# Altium PCB Medusa-AI-ESP.PcbDoc (part 1 of 2)
Units mil, origin at the board's own origin, x right, y up, seen from the top; angles counter-clockwise.
Board outline 7750 x 7750 mil, 4 copper layers (Top Layer, Layer 1, Layer 2, Bottom Layer), stack 23.756 mil thick; 124 components, 93 nets, 550 pads, 211 vias.
Unrouted connection lines stored in the file: 1.
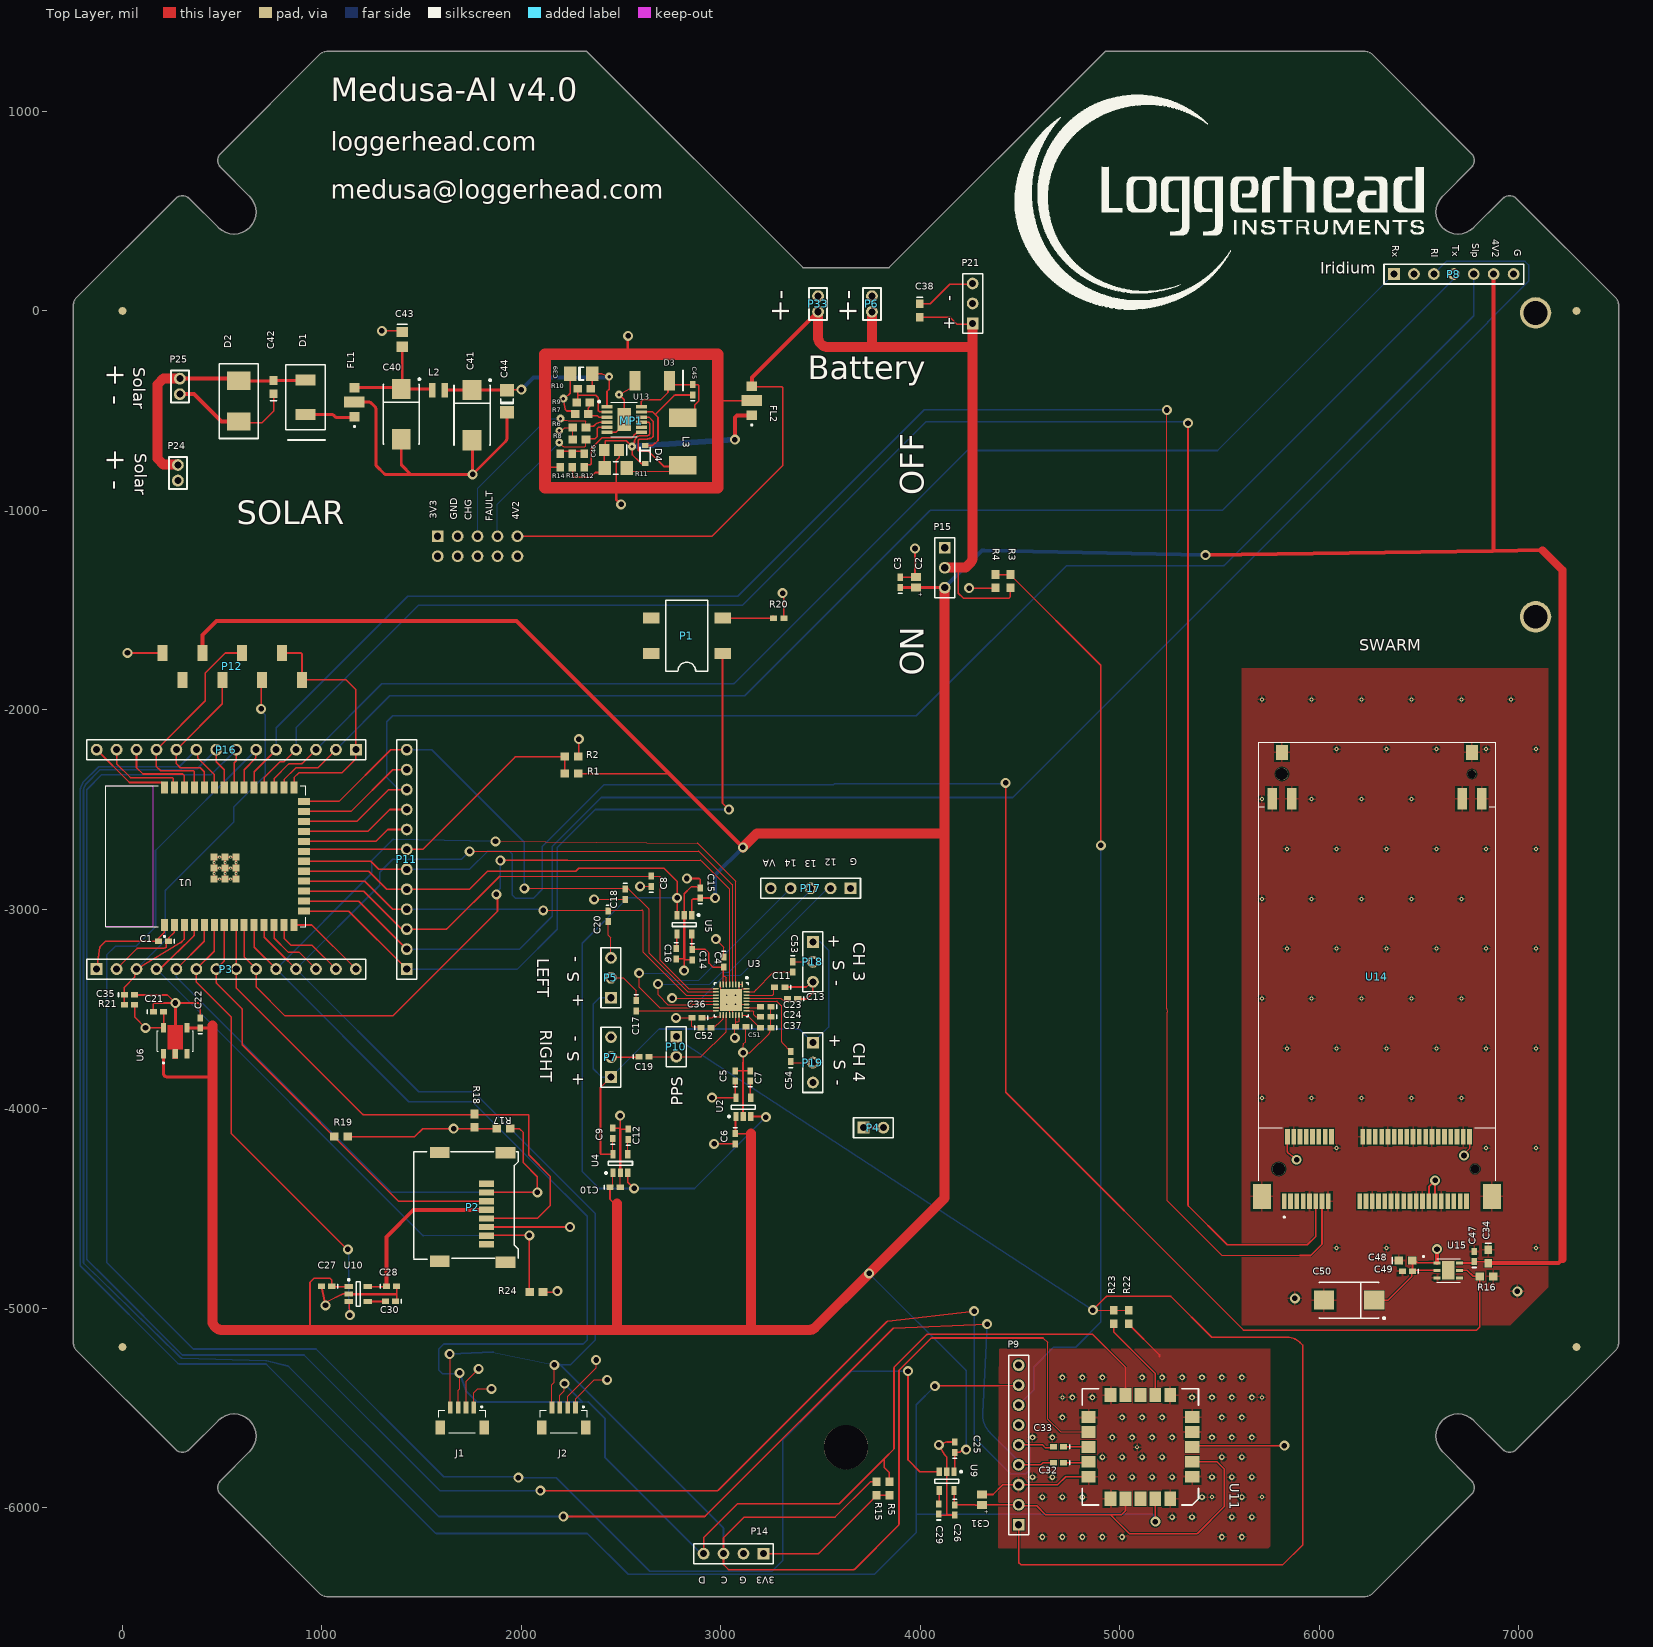
[diagram p0: Top Layer view]
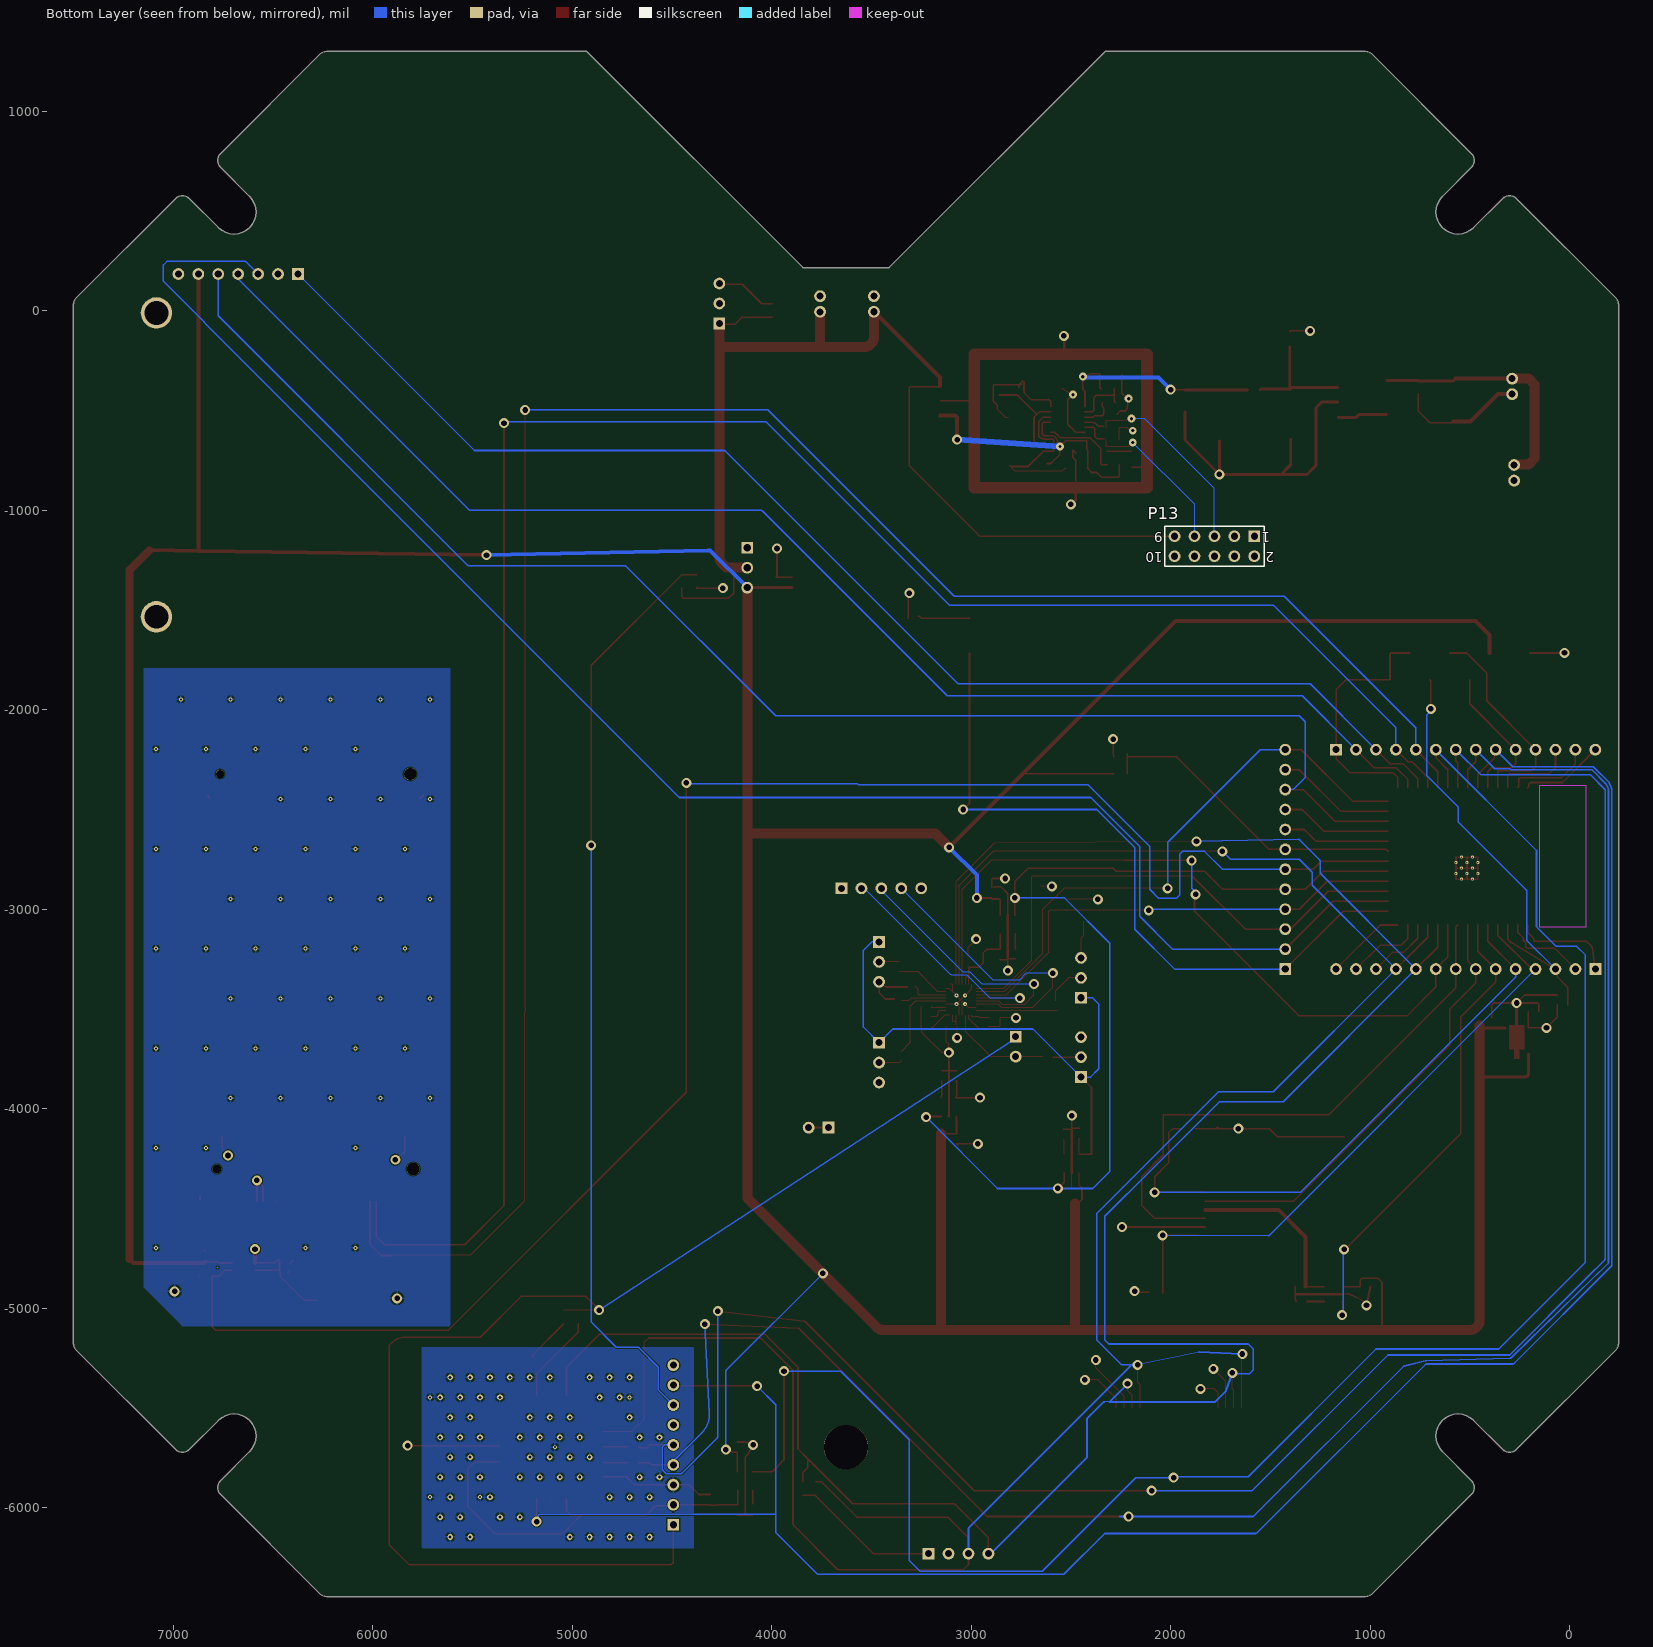
[diagram p1: Bottom Layer view, seen from below]
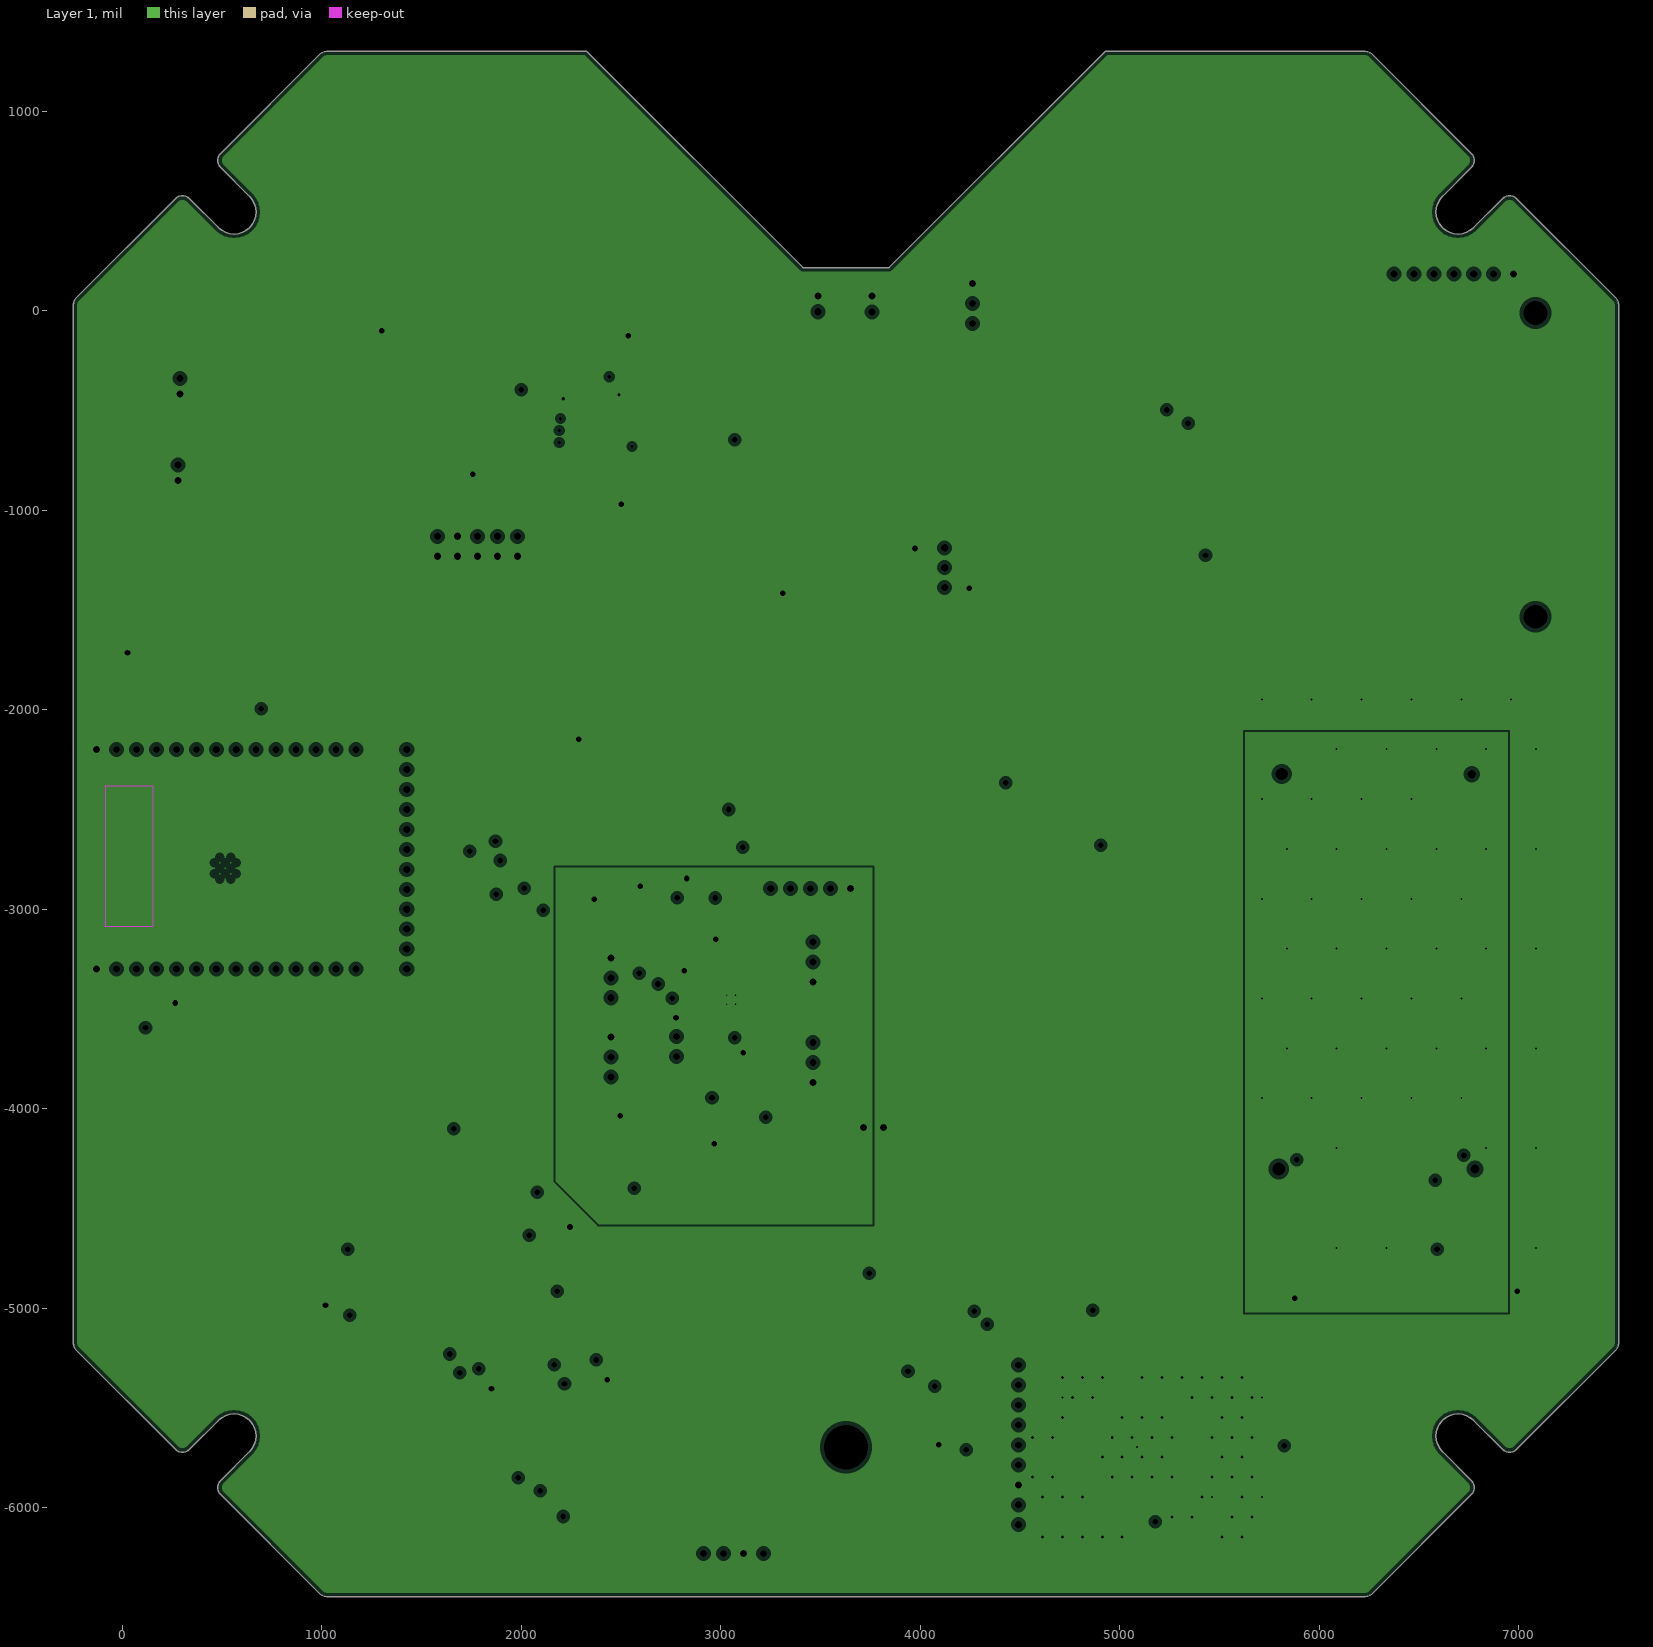
[diagram p2: Layer 1, clearances drawn from the general rule]
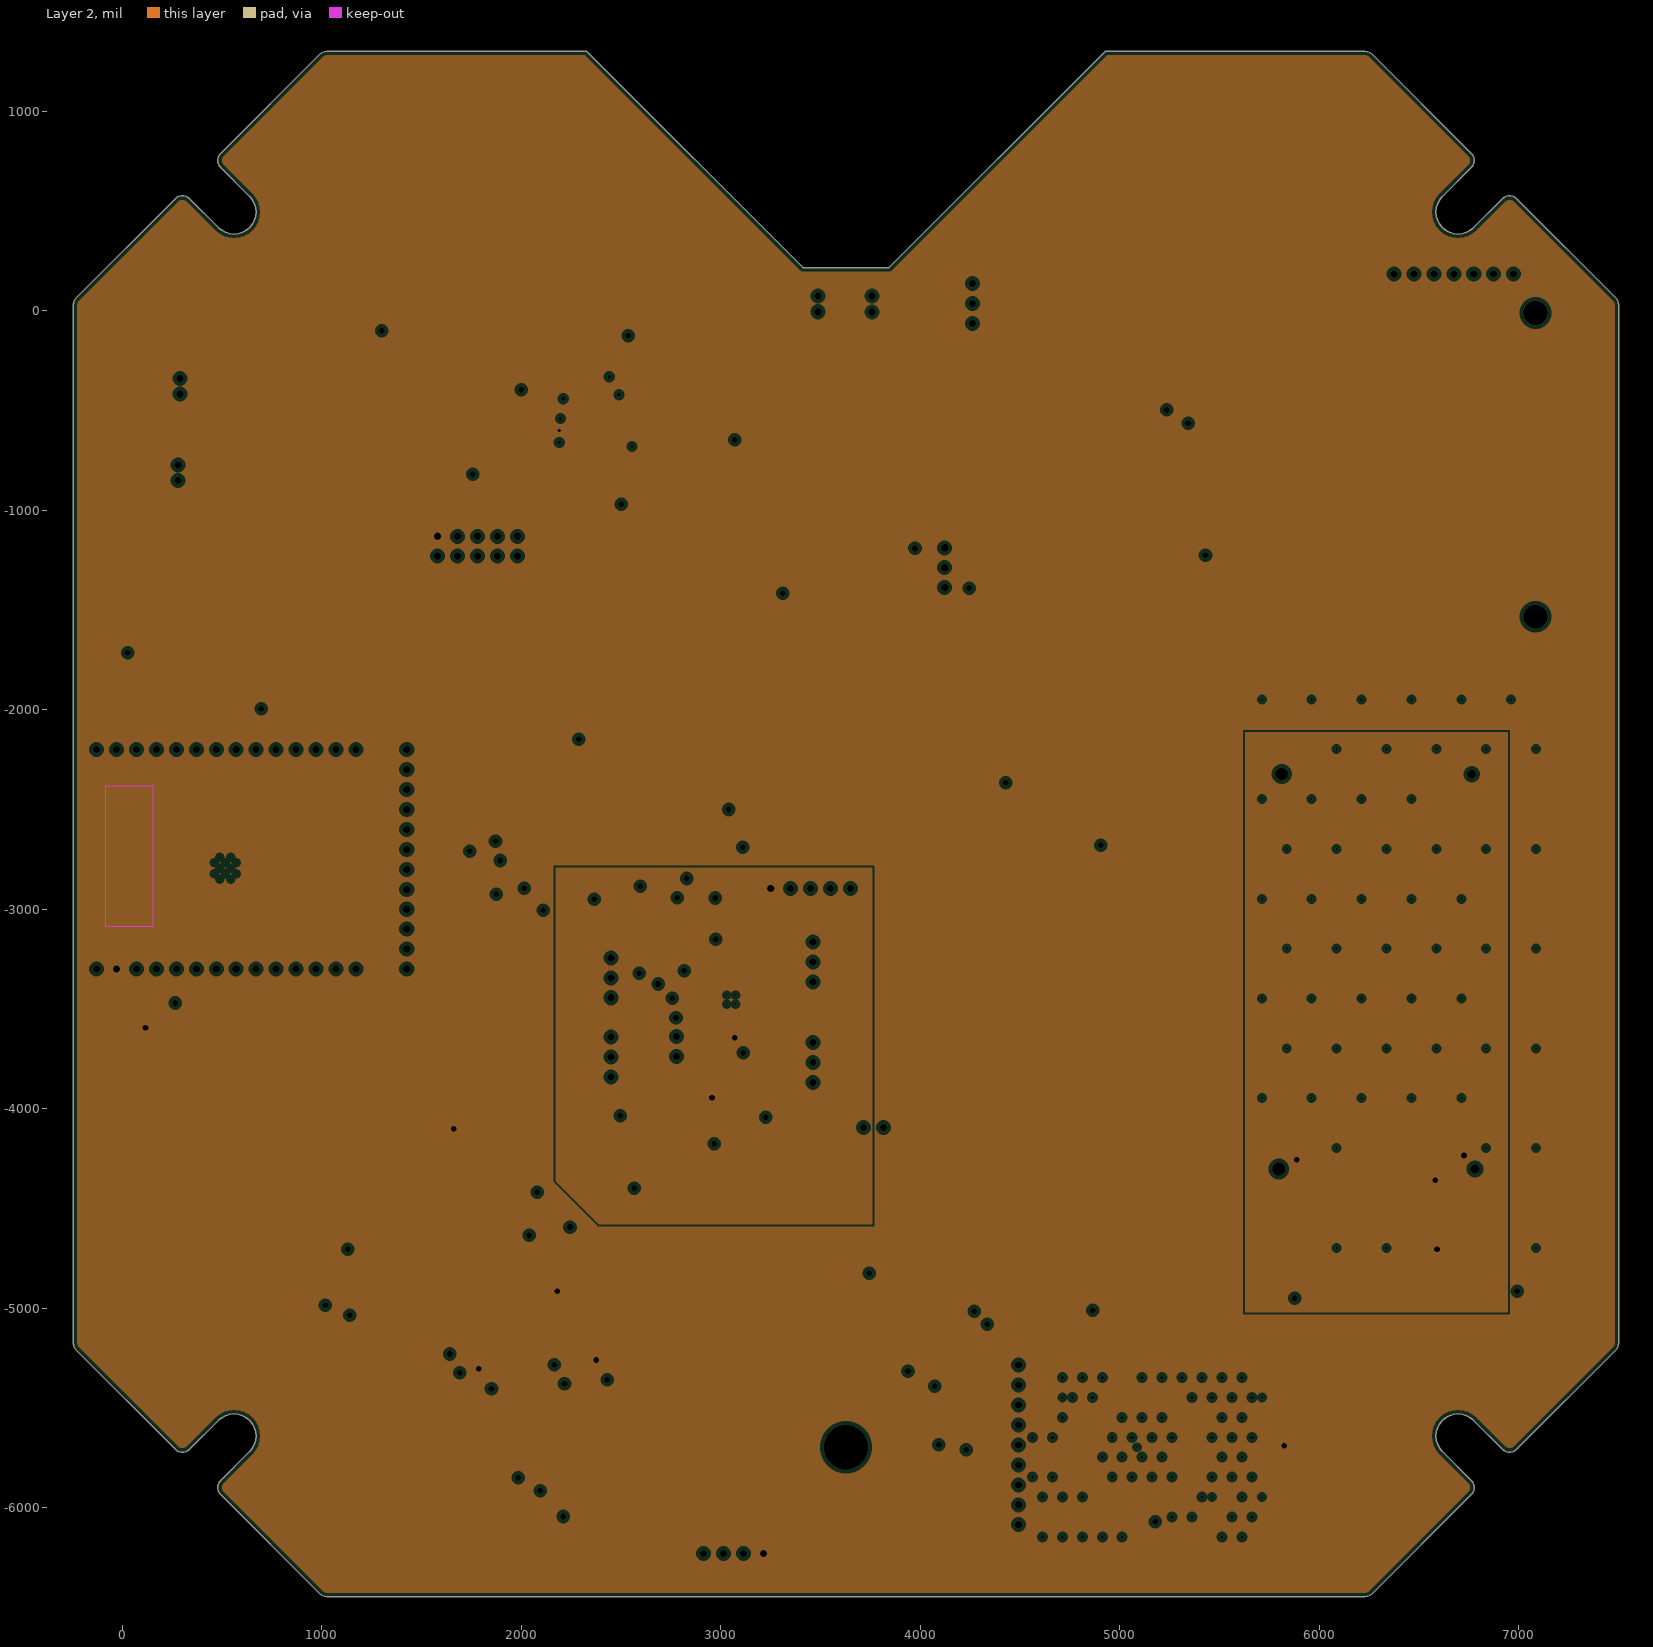
[diagram p3: Layer 2, clearances drawn from the general rule]

## Layer stack, top to bottom
Top Solder: solder mask 0.4, Solder Resist, Dk 3.5
Top Layer: signal copper 1.4
Dielectric 2: prepreg 2.8, PP-006, Dk 4.1
Layer 1: plane copper 1.378, net (Multiple Nets)
Dielectric 1: dielectric 12.6, FR-4, Dk 4.8
Layer 2: plane copper 1.378, net (Multiple Nets)
Dielectric 3: prepreg 2.8, PP-006, Dk 4.1
Bottom Layer: signal copper 1.4
Bottom Solder: solder mask 0.4, Solder Resist, Dk 3.5

## Board outline
477.66,-5894.11 480.16,-5883.2 485.01,-5873.11 491.99,-5864.36 637.15,-5719.2 650.89,-5702.46 661.1,-5683.36 667.39,-5662.63 669.51,-5641.07 667.39,-5619.51 661.1,-5598.78 650.89,-5579.68 637.15,-5562.93 620.4,-5549.19 601.3,-5538.98 580.57,-5532.69 559.01,-5530.57 537.45,-5532.69 516.72,-5538.98 497.62,-5549.19 480.87,-5562.93 335.72,-5708.08 326.97,-5715.07 316.88,-5719.92 305.97,-5722.42 294.77,-5722.42 283.85,-5719.92 273.77,-5715.07 265.01,-5708.08 -232.91,-5210.16 -240.86,-5199.8 -245.86,-5187.74 -247.56,-5174.8 -247.56,29.53 -245.86,42.47 -240.86,54.53 -232.91,64.88 265.01,562.81 273.77,569.79 283.85,574.65 294.77,577.14 305.97,577.14 316.88,574.65 326.97,569.79 335.72,562.81 480.87,417.66 497.62,403.92 516.72,393.7 537.45,387.42 559.01,385.29 580.57,387.42 601.3,393.7 620.4,403.92 637.14,417.66 650.89,434.4 661.1,453.51 667.39,474.24 669.51,495.79 667.39,517.35 661.1,538.08 650.89,557.18 637.14,573.93 491.99,719.08 485.01,727.83 480.16,737.92 477.66,748.84 477.66,760.03 480.16,770.95 485.01,781.04 491.99,789.79 989.92,1287.72 1000.28,1295.66 1012.34,1300.66 1025.28,1302.36 2326.36,1302.36 3411.36,217.36 3843.52,217.36 4928.52,1302.36 6229.61,1302.36 6242.55,1300.66 6254.61,1295.66 6264.96,1287.72 6762.89,789.79 6769.87,781.04 6774.73,770.95 6777.22,760.03 6777.22,748.84 6774.73,737.92 6769.87,727.83 6762.89,719.08 6617.74,573.93 6603.99,557.18 6593.78,538.08 6587.5,517.35 6585.37,495.79 6587.5,474.24 6593.78,453.51 6603.99,434.4 6617.74,417.66 6634.48,403.92 6653.59,393.71 6674.31,387.42 6695.87,385.29 6717.43,387.42 6738.16,393.71 6757.26,403.92 6774.01,417.66 6919.16,562.81 6927.91,569.79 6938,574.65 6948.92,577.14 6960.11,577.14 6971.03,574.65 6981.12,569.79 6989.87,562.81 7487.8,64.88 7495.74,54.53 7500.74,42.47 7502.44,29.53 7502.44,-5174.8 7500.74,-5187.74 7495.74,-5199.8 7487.8,-5210.16 6989.87,-5708.08 6981.12,-5715.07 6971.03,-5719.92 6960.11,-5722.41 6948.92,-5722.41 6938,-5719.92 6927.91,-5715.07 6919.16,-5708.08 6774.01,-5562.93 6757.26,-5549.19 6738.16,-5538.98 6717.43,-5532.69 6695.87,-5530.57 6674.32,-5532.69 6653.59,-5538.98 6634.48,-5549.19 6617.74,-5562.93 6604,-5579.68 6593.78,-5598.78 6587.5,-5619.51 6585.37,-5641.07 6587.5,-5662.63 6593.78,-5683.36 6604,-5702.46 6617.74,-5719.2 6762.89,-5864.35 6769.87,-5873.11 6774.73,-5883.2 6777.22,-5894.11 6777.22,-5905.31 6774.73,-5916.22 6769.87,-5926.31 6762.89,-5935.07 6264.96,-6432.99 6254.61,-6440.94 6242.55,-6445.93 6229.61,-6447.64 1025.28,-6447.64 1012.34,-6445.93 1000.28,-6440.94 989.92,-6432.99 491.99,-5935.07 485.01,-5926.31 480.16,-5916.22 477.66,-5905.31

## Design rules (kind name [scope] priority, off if disabled: settings)
Clearance [All] p1: gap=5 ignorepadtopadclearanceinfootprint=FALSE except(0: Arc-Hole Track-Hole SMDPad-Hole THPad-Hole Via-Hole Fill-Hole Poly-Hole Region-Hole Text-Hole; 8: Arc-Arc Arc-Track Track-Track)
HoleSize [All] p1: absolutevalues=TRUE maxlimit=300 minlimit=1 maxpercent=80.000 minpercent=20.000
MinimumSolderMaskSliver [All] p1: minsoldermaskwidth=2
PlaneClearance [All] p1: clearance=20
PlaneConnect [All] p1: planeconnectstyle=Relief reliefexpansion=20 reliefentries=4 reliefconductorwidth=10 reliefairgap=10
PolygonConnect [All] p1: connectstyle=Relief reliefconductorwidth=10 reliefentries=4 polygonreliefangle="90 Angle" airgapwidth=10
RoutingVias [All] p1: holewidth=28 width=50 viastyle="Through Hole" minholewidth=28 minwidth=50 maxholewidth=28 maxwidth=50
SilkToSilkClearance [All] p1: silktosilkclearance=1
SolderMaskExpansion [All] p1: expansion=4 istentingtop=FALSE
Width [All] p1: maxlimit=100 minlimit=6 preferedwidth=8
25 further rules are at their usual default settings.

## Classes and differential pairs
component class medusa-ai-sensors: C31 C32 C33 P9 R3 R4 R5 R15 R22 R23 U11
component class medusa-charger: C38 C39 C40 C41 C42 C43 C44 C45 C46 D1 D2 D3 D4 FL1 FL2 L2 L3 MP1 P6 P13 P21 P24 P25 P33 R6 R7 R8 R9 R10 R11 R12 R13 R14 U13
component class medusa-ai-power: C25 C26 C27 C28 C29 C30 C34 C47 C48 C49 C50 R16 U9 U10 U15
component class Medusa-AI-ESP: C1 C2 C3 C21 C22 C35 J1 J2 P1 P2 P3 P8 P11 P12 P14 P15 P16 R1 R2 R17 R18 R19 R20 R21 R24 U1 U6 U14
component class medusa-ai-audio: C4 C5 C6 C7 C8 C9 C10 C11 C12 C13 C14 C15 C16 C17 C18 C19 C20 C23 C24 C36 C37 C51 C52 C53 C54 P4 P5 P7 P10 P17 P18 P19 U2 U3 U4 U5

## Components (designator, comment, footprint, x,y, rotation, side; value= is the part's Value field where it differs from the comment)
C1 "0.1uF" 0402 205,-3160 r180 top
C2 "10uF" Tant0805 3978.31,-1361.1 r270 top
C3 "0.1uF" 0402 3898.31,-1361.1 r90 top
C4 "0.1uF" 0402 3015,-3265 r270 top
C5 "2.2uF" 0402 3073.27,-3835.71 r90 top value=0.1uF
C6 "1uF" 0402 3073.27,-4150.71 r270 top value=0.1uF
C7 "0.01uF" 0402 3148.27,-3835.71 r90 top value=0.1uF
C8 "22pF" 0402 2650,-2860 r90 top value=0.1uF
C9 "2.2uF" 0402 2456.83,-4123.35 r90 top value=0.1uF
C10 "1uF" 0402 2469.95,-4395.04 r0 top value=0.1uF
C11 "1uF" 0402 3295,-3390 r180 top value=0.1uF
C12 "0.01uF" 0402 2536.83,-4128.35 r90 top value=0.1uF
C13 "1uF" 0402 3360,-3450 r180 top value=0.1uF
C14 "2.2uF" 0402 2855.77,-3228.17 r270 top value=0.1uF
C15 "1uF" 0402 2895.77,-2918.17 r90 top value=0.1uF
C16 "0.01uF" 0402 2775.77,-3223.17 r270 top value=0.1uF
C17 "1.0uF" 0402 2576.64,-3483.94 r270 top value=0.1uF
C18 "22pF" 0402 2520,-2925 r270 top value=0.1uF
C19 "1.0uF" 0402 2614.95,-3740.04 r0 top value=0.1uF
C20 "22pF" 0402 2435,-3035 r270 top value=0.1uF
C21 "4.7uF" 0402 180,-3515 r0 top value=0.1uF
C22 "4.7uF" 0402 390,-3570 r90 top value=0.1uF
C23 "1uF" 0402 3225,-3490 r180 top value=0.1uF
C24 "1uF" 0402 3225,-3540 r180 top value=0.1uF
C25 "1.0uF" 0402 4172.44,-5697.48 r90 top value=0.1uF
C26 "2.2uF" 0402 4172.44,-6012.48 r270 top value=0.1uF
C27 "1.0uF" 0402 1023.31,-4891.1 r180 top value=0.1uF
C28 "2.2uF" 0402 1348.31,-4891.1 r0 top value=0.1uF
C29 "10nF" 0402 4092.44,-6007.48 r90 top value=0.1uF
C30 "10nF" 0402 1343.31,-4966.1 r180 top value=0.1uF
C31 "1uF" Tant0805 4308.31,-5961.1 r270 top
C32 "0402 Ferrite/100 ohm" 0402 4693.31,-5776.1 r180 top value=100pF
C33 "0402 Ferrite/100 ohm" 0402 4693.31,-5696.1 r180 top value=100pF
C34 "C0603" 0603 6847.44,-4741.1 r270 top value=10uF
C35 "1uF" 0402 35,-3430 r0 top value=0.1uF
C36 "1uF" 0402 2880,-3545 r180 top value=0.1uF
C37 "1uF" 0402 3225,-3595 r180 top value=0.1uF
C38 "C0603" 0603 3997.44,2.36 r270 top
C39 "C1206" 1206 2300,-315 r0 top
C40 "T495X" X 1397.44,-517.64 r270 top value=47uF
C41 "T495X" X 1752.44,-522.64 r270 top value=47uF
C42 "C0603" 0603 757.44,-382.64 r90 top
C43 "C0805" 0805 1402.44,-142.64 r270 top value=4.7uF
C44 "C1206" 1206 1927.44,-452.64 r90 top
C45 "C0402" 0402 2860,-395 r90 top value=1uF
C46 "C0805" 0805 2452.44,-697.64 r180 top
C47 "1.0uF" 0402 6777.44,-4741.1 r90 top value=0.1uF
C48 "C0603" 0603 6432.44,-4761.1 r0 top value=10uF
C49 "0.1uF" 0402 6442.44,-4816.1 r180 top
C50 "T495X227K010ATE050" X 6150,-4960 r180 top value=220uF
C51 "1uF" 0402 3100,-3590 r180 top value=0.1uF
C52 "1uF" 0402 2925,-3595 r0 top value=0.1uF
C53 "1.0uF" 0402 3361.64,-3288.94 r270 top value=0.1uF
C54 "1.0uF" 0402 3351.64,-3738.94 r90 top value=0.1uF
D1 "PMEG3050EP*" Diode_PMEG3050EP 917.44,-432.64 r270 top
D2 "26.7V Breakdown" SMBJ24CA 582.44,-452.64 r270 top
D3 "PMEG3050EP*" Diode_PMEG3050EP 2655,-350 r0 top
D4 "BAT46WJ" SOD-323 2620,-719.72 r270 top
FL1 "YFF31HC2A105MT000N" FIL_YFF31HC2A105MT000N 1162.44,-457.64 r90 top
FL2 "YFF31HC2A105MT000N" FIL_YFF31HC2A105MT000N 3155,-450 r90 top
J1 "BM04B-SRSS-TB(LF)(SN)" CONN_BM04B-SRSS-TB(LF)(SN) 1702.44,-5551.1 r180 top
J2 "BM04B-SRSS-TB(LF)(SN)" CONN_BM04B-SRSS-TB(LF)(SN) 2212.2,-5551.1 r180 top
L2 "Inductor2016" Inductor2016 1552.44,-397.64 r0 top value=0.47uH
L3 "10uH" Inductor0630CDMCD 2810,-655 r270 top
MP1 "MS223-10F" MS223-10F 2550,-550 r180 top
P1 "factory reset" SOP4 3008.27,-1717.17 r180 top
P2 "microSD-Molex" microSD_Molex_hinged 1920,-4750 r180 top
P3 "Header 14" HDR1X14 -130,-3300 r0 top
P4 "GND Tie" HDR1X2 3715,-4095 r0 top
P5 "HYDROPHONE L" HDR1X3 2449.08,-3443.94 r90 top
P6 "BAT" HDR_2x1_2mm 3757.44,-5 r0 top
P7 "HYDROPHONE R" HDR1X3 2449.08,-3841.57 r90 top
P8 "Iridium" HDR1X7 6375,185 r0 top
P9 "GPS" HDR1X9 4493.31,-6086.1 r90 top
P10 "Jumper PPS to Audio R" HDR1X2 2776.64,-3638.94 r270 top
P11 "Header 12" HDR1X12 1425,-3300 r90 top
P12 "10129380-908001BLF" Header_8_SMT 200,-1715 r0 top
P13 "Header 5X2" HDR2X5 1580,-1130 r0 bottom
P14 "Display" HDR1X4 3213.31,-6231.1 r180 top
P15 "switch" HDR1X3 4122.44,-1187.64 r270 top
P16 "Header 14" HDR1X14 1170,-2200 r180 top
P17 "Header 5" HDR1X5 3650,-2895 r180 top
P18 "HYDROPHONE 3" HDR1X3 3461.64,-3163.94 r270 top
P19 "HYDROPHONE 4" HDR1X3 3461.64,-3668.94 r270 top
P21 "3000uF" HDR1X3 4262.44,-62.64 r90 top
P24 "SOLAR" HDR_2x1_2mm 277.44,-772.01 r180 top
P25 "SOLAR" HDR_2x1_2mm 287.44,-338.9 r180 top
P33 "BAT" HDR_2x1_2mm 3487.44,-4.84 r0 top
R1 "100k" 3-0603 2251.54,-2320 r0 top
R2 "100k" 3-0603 2251.54,-2235 r180 top
R3 "100k" 3-0603 4451.69,-1355.43 r270 top
R4 "100k" 3-0603 4376.69,-1355.43 r90 top
R5 "4.7k" 3-0603 3845,-5905 r270 top
R6 "330K" 3-0603 2290,-585 r0 top
R7 "51K" 3-0603 2302.44,-517.64 r0 top
R8 "330K" 3-0603 2290,-645 r0 top
R9 "51K" 3-0603 2310,-460 r0 top
R10 "301K" 3-0603 2315,-390 r180 top
R11 "50mOhms" 8-1206 2472.44,-787.64 r180 top
R12 "205K" 3-0603 2315,-750 r270 top
R13 "64K9" 3-0603 2255,-750 r90 top
R14 "330K" 3-0603 2195,-750 r90 top
R15 "4.7k" 3-0603 3780,-5905 r270 top
R16 "20k" 3-0603 6838.97,-4840.69 r0 top
R17 "10K" 3-0603 1910,-4100 r0 top
R18 "10K" 3-0603 1765,-4060 r90 top
R19 "10K" 3-0603 1095,-4140 r180 top
R20 "10k" 2-0402 3290,-1540 r0 top
R21 "10k" 2-0402 35,-3480 r180 top
R22 "10k" 3-0603 5045,-5045 r90 top
R23 "10k" 3-0603 4970,-5045 r270 top
R24 "10K" 3-0603 2075,-4920 r180 top
U1 "ESP32-S3-WROOM-1-N16R8" XCVR_ESP32-S3-WROOM-1-N16R2 417.09,-2734.49 r90 top
U2 "ADP1712" MF05A_N 3112.4,-3992.24 r90 top
U3 "ES7210" ES7210 3051.64,-3453.94 r270 top
U4 "ADP1712" MF05A_N 2495.97,-4274.88 r90 top
U5 "ADP1712" MF05A_N 2816.64,-3076.63 r270 top
U6 "3.3V LDO" AP7361C-33Y5-13 205,-3725 r90 top
U9 "ADP1712" MF05A_N 4132.44,-5867.48 r270 top
U10 "ADP1712" MF05A_N 1181.42,-4929.57 r0 top
U11 "SAM-M8Q" "GPS SAM-MQ8" 5363.31,-5845.51 r180 top
U13 "LT3652IMSEPBF" MSOP-12_MSE 2515,-545 r0 top
U14 "M138_MODEM" XCVR_M138_MODEM 5797.48,-4302.4 r0 top
U15 "LD39200PU33R" SON95P300X300X100-7N 6647.44,-4811.1 r0 top

## Footprints (in the part's own frame and the unit in brackets; to place one, negate y for a bottom-side part, rotate by r counter-clockwise, add the part's x,y. Pads: shape width x height; smd on the part's side, far side on the other; paste and mask are expansions set on the pad)
2-0402 [mm] "Chip Resistor; Body 1 x 0.5 mm (LxW typ)"
  rect 0.9x0.7 smd: 1(-0.65,0) 2(0.65,0)
3-0603 [mm] "Chip Resistor; Body 1.6 x 0.9 mm (LxW typ)"
  rect 1.1x1 smd: 1(-0.85,0) 2(0.85,0)
8-1206 [mm] "Chip Resistor; Body 3.1 x 1.6 mm (LxW typ)"
  rect 1.6x1.8 smd: 1(-1.4,0) 2(1.4,0)
  silkscreen extent -0.3,-0.8 0.3,0.8
0402 [mm] "Chip Capacitor; Body 1.0 x 0.5 mm (LxW typ)"
  rect 0.9x0.7 smd: 1(-0.65,0) 2(0.65,0)
  silkscreen extent -1.4,-0.25 -1.4,0.25
0603 [mm] "Chip Capacitor; Body 1.6 x 0.8 mm (LxW typ)"
  rect 1.1x1 smd: 1(-0.85,0) 2(0.85,0)
  silkscreen extent -1.7,-0.4 -1.7,0.4
0805 [mm] "Chip Capacitor; Body 2.0 x 1.2 mm (LxW typ)"
  rect 1.3x1.5 smd: 1(-0.95,0) 2(0.95,0)
  silkscreen extent -1.9,-0.65 -1.9,0.65
1206 [mm] "Chip Capacitor; Body 3.2 x 1.6 mm (LxW typ)"
  rect 1.6x1.8 smd: 1(-1.4,0) 2(1.4,0)
  silkscreen extent -0.3,-0.8 0.3,0.8
AP7361C-33Y5-13 [mm] "3.3V LDO"
  rect 1.2x0.68 smd: 1(0,0) 3(0,-3) 4(3.3,-3) 5(3.3,0)
  rect 1.2x0.68 smd paste-2 mask+0: 2(0,-1.5)
  Top Layer region: 3.65,-2.465 0.6,-2.465 0.6,-1.84 -0.6,-1.84 -0.6,-1.16 0.6,-1.16 0.6,-0.535 3.65,-0.535
  silkscreen extent -1.25,-3.8 2.95,0.8
CONN_BM04B-SRSS-TB(LF)(SN) [mm]
  rect 0.6x1.55 smd: 1(-1.5,-1.325) 2(-0.5,-1.325) 3(0.5,-1.325) 4(1.5,-1.325)
  rect 1.2x1.8 smd: S1(-2.8,1.2) S2(2.8,1.2)
  silkscreen extent -3,-1.52 3,1.9
Diode_PMEG3050EP [mm]
  rect 1.4x2.5 smd: A(-2.2,0) K(2.2,0)
  silkscreen extent -4.15,-2.5 5.45,2.5
ES7210 [mm] "4-ch audio codec"
  oval 0.75x0.2 smd mask+0.025: 1(-1.95,1.4) 2(-1.95,1) 3(-1.95,0.6) 4(-1.95,0.2) 5(-1.95,-0.2) 6(-1.95,-0.6) 7(-1.95,-1) 8(-1.95,-1.4) 17(1.95,-1.4) 18(1.95,-1) 19(1.95,-0.6) 20(1.95,-0.2) 21(1.95,0.2) 22(1.95,0.6) 23(1.95,1) 24(1.95,1.4)
  oval 0.2x0.75 smd mask+0.025: 9(-1.4,-1.95) 10(-1,-1.95) 11(-0.6,-1.95) 12(-0.2,-1.95) 13(0.2,-1.95) 14(0.6,-1.95) 15(1,-1.95) 16(1.4,-1.95) 25(1.4,1.95) 26(1,1.95) 27(0.6,1.95) 28(0.2,1.95) 29(-0.2,1.95) 30(-0.6,1.95) 31(-1,1.95) 32(-1.4,1.95)
  rect 2.8x2.8 smd: 33(0,0)
  silkscreen extent -2.92,-2.15 2.15,2.15, body extent -2,-2 2,2, height 0.75
FIL_YFF31HC2A105MT000N [mm]
  rect 1.2x1.3 smd mask+0: 1(-1.85,0) 3(1.85,0)
  rect 1.4x2.6 smd paste-2 mask+0: 2_4(0,0)
  silkscreen extent -3.2,-0.1 -3,0.1, body extent -1.6,-0.8 1.6,0.8, height 1.5
"GPS SAM-MQ8" [mm]
  rect 1.8x1.5 smd paste-0.25 mask+0.076: 1(0,0) 2(0,-1.9) 3(0,-3.8) 4(0,-5.7) 5(0,-7.6) 11(13.2,-7.6) 12(13.2,-5.7) 13(13.2,-3.8) 14(13.2,-1.9) 15(13.2,0)
  rect 1.5x1.8 smd paste-0.25 mask+0.076: 6(2.8,-10.4) 7(4.7,-10.4) 8(6.6,-10.4) 9(8.5,-10.4) 10(10.4,-10.4) 16(10.4,2.8) 17(8.5,2.8) 18(6.6,2.8) 19(4.7,2.8) 20(2.8,2.8)
  silkscreen extent -0.8,-11.2 14,3.6
HDR1X2 [mm] "Connector; Header; 2 Position"
  rect 1.5x1.5 hole 0.9: 1(0,0)
  round 1.5 hole 0.9: 2(2.54,0)
  silkscreen extent -1.27,-1.27 3.81,1.27
HDR1X3 [mm] "Connector; Header; 3 Position"
  rect 1.5x1.5 hole 0.9: 1(0,0)
  round 1.5 hole 0.9: 2(2.54,0) 3(5.08,0)
  silkscreen extent -1.27,-1.27 6.35,1.27
HDR1X4 [mm] "Connector; Header; 4 Position"
  rect 1.5x1.5 hole 0.9: 1(0,0)
  round 1.5 hole 0.9: 2(2.54,0) 3(5.08,0) 4(7.62,0)
  silkscreen extent -1.27,-1.27 8.89,1.27
HDR1X5 [mm] "Connector; Header; 5 Position"
  rect 1.5x1.5 hole 0.9: 1(0,0)
  round 1.5 hole 0.9: 2(2.54,0) 3(5.08,0) 4(7.62,0) 5(10.16,0)
  silkscreen extent -1.27,-1.27 11.43,1.27
HDR1X7 [mm] "Connector; Header; 7 Position"
  rect 1.5x1.5 hole 0.9: 1(0,0)
  round 1.5 hole 0.9: 2(2.54,0) 3(5.08,0) 4(7.62,0) 5(10.16,0) 6(12.7,0) 7(15.24,0)
  silkscreen extent -1.27,-1.27 16.51,1.27
HDR1X9 [mm] "Connector; Header; 9 Position"
  rect 1.5x1.5 hole 0.9: 1(0,0)
  round 1.5 hole 0.9: 2(2.54,0) 3(5.08,0) 4(7.62,0) 5(10.16,0) 6(12.7,0) 7(15.24,0) 8(17.78,0) 9(20.32,0)
  silkscreen extent -1.27,-1.27 21.59,1.27
HDR1X12 [mm] "Connector; Header; 12 Position"
  rect 1.5x1.5 hole 0.9: 1(0,0)
  round 1.5 hole 0.9: 2(2.54,0) 3(5.08,0) 4(7.62,0) 5(10.16,0) 6(12.7,0) 7(15.24,0) 8(17.78,0) 9(20.32,0) 10(22.86,0) 11(25.4,0) 12(27.94,0)
  silkscreen extent -1.27,-1.27 29.21,1.27
HDR1X14 [mm] "Connector; Header; 14 Position"
  rect 1.5x1.5 hole 0.9: 1(0,0)
  round 1.5 hole 0.9: 2(2.54,0) 3(5.08,0) 4(7.62,0) 5(10.16,0) 6(12.7,0) 7(15.24,0) 8(17.78,0) 9(20.32,0) 10(22.86,0) 11(25.4,0) 12(27.94,0) 13(30.48,0) 14(33.02,0)
  silkscreen extent -1.27,-1.27 34.29,1.27
HDR2X5 [mm] "Connector; Header; 5x2 Position"
  rect 1.5x1.5 hole 0.9: 1(0,0)
  round 1.5 hole 0.9: 2(0,2.54) 3(2.54,0) 4(2.54,2.54) 5(5.08,0) 6(5.08,2.54) 7(7.62,0) 8(7.62,2.54) 9(10.16,0) 10(10.16,2.54)
  silkscreen extent -1.27,-1.27 11.43,3.81
HDR_2x1_2mm [mm]
  round 1.5 hole 0.9: 1(0,0.016) 2(0,2)
  silkscreen extent -1.14,-1.02 1.14,3.05
Header_8_SMT [mil] "Amphenol  10129380-908001BLF"
  rect 50x80 smd: 1(0,0) 2(100,-135) 3(200,0) 4(300,-135) 5(400,0) 6(500,-135) 7(600,0) 8(700,-135)
Inductor0630CDMCD [mm]
  rect 2.35x3.5 smd: 1(-3.025,0) 2(3.025,0)
Inductor2016 [mm]
  rect 0.8x1.8 smd: 1(0,0) 2(1.6,0)
MF05A_N [mm] "SOT23, 5-Leads, Body 2.9x1.6mm, Pitch 0.95mm, Lead Span 2.8mm, IPC Medium Density"
  rect 1.1x0.65 smd: 1(-1.2,0.95) 2(-1.2,0) 3(-1.2,-0.95) 4(1.2,-0.95) 5(1.2,0.95)
  silkscreen extent -1.32,-1.55 0.25,1.95, body extent -0.9,-1.55 0.9,1.55, height 1.19
microSD_Molex_hinged [mm]
  rect 2.5x1.5 smd: 0(0,0.508) 0(8.382,0.381)
  rect 2.5x1.45 smd: 0(0,-13.45) 0(8.382,-13.462)
  rect 1.9x0.8 smd: 1(2.4,-9.475) 2(2.4,-8.375) 3(2.4,-7.275) 4(2.4,-6.175) 5(2.4,-5.075) 6(2.4,-3.975) 7(2.4,-2.875) 8(2.4,-1.775)
  silkscreen extent -1.65,-13.59 11.68,0.13
MS223-10F [mil]
  Top Layer lines w59.06: 432.09,336.61 432.09,335.41 432.09,233.46 432.09,230.41 432.09,-331.91 432.09,-332.68 425.39,-332.68 17.5,-332.68 0,-332.68 -0.76,-332.68 -375,-332.68 -430.15,-332.68 -430.91,-332.68 -434.06,-332.68 -434.06,-331.91 -434.06,-109.59 -434.06,-100 -434.06,335.41 -434.06,336.61 -426.18,336.61 -371.18,336.61 -56.18,336.61 0,336.61 29.68,336.61 75,336.61 427.35,336.61 432.09,336.61
MSOP-12_MSE [mil]
  rect 55x17 smd paste-3 mask+2: 1(-86,64) 2(-86,38.4) 3(-86,12.8) 4(-86,-12.8) 5(-86,-38.4) 6(-86,-64) 7(86,-64) 8(86,-38.4) 9(86,-12.8) 10(86,12.8) 11(86,38.4) 12(86,64)
  rect 69x116 smd paste-200: 13(0,0)
  silkscreen extent -66,-86 66,86
SMBJ24CA [mm]
  rect 2.3x3 smd: 1(-2.6,0) 2(2.6,0)
  silkscreen extent -4.75,-2.5 4.75,2.5
SOD-323 [mm]
  rect 0.63x0.83 smd: A(1.15,0) C(-1.15,0)
  silkscreen extent -0.9,-0.65 0.9,0.65
SON95P300X300X100-7N [mm]
  rrect25% 0.86x0.4 smd: 1(-1.435,0.95) 2(-1.435,0) 3(-1.435,-0.95) 4(1.435,-0.95) 5(1.435,0) 6(1.435,0.95)
  rect 1.63x2.37 smd paste-2: 7(0,0)
  silkscreen extent -3.27,-1.5 1.5,1.88
SOP4 [mm]
  rect 2.1x1.4 smd: 1(0,0) 2(0,-4.5) 3(9.1,-4.5) 4(9.1,0)
  silkscreen extent 1.89,-6.75 7.21,2.25
Tant0805 [mil]
  rect 40x50 smd: 1(-26.5,0) 2(26.5,0)
X [mm] "Capacitor, SM Tantalum; Body 7.3 x 4.3 mm (LxW typ)"
  rect 2.6x2.4 smd: 1(-3.2,0) 2(3.2,0)
  silkscreen extent -4.57,-2.3 3.8,2.43
XCVR_ESP32-S3-WROOM-1-N16R2 [mm]
  rect 1.5x0.9 smd: 1(-8.75,5.26) 2(-8.75,3.99) 3(-8.75,2.72) 4(-8.75,1.45) 5(-8.75,0.18) 6(-8.75,-1.09) 7(-8.75,-2.36) 8(-8.75,-3.63) 9(-8.75,-4.9) 10(-8.75,-6.17) 11(-8.75,-7.44) 12(-8.75,-8.71) 13(-8.75,-9.98) 14(-8.75,-11.25) 27(8.75,-11.25) 28(8.75,-9.98) 29(8.75,-8.71) 30(8.75,-7.44) 31(8.75,-6.17) 32(8.75,-4.9) 33(8.75,-3.63) 34(8.75,-2.36) 35(8.75,-1.09) 36(8.75,0.18) 37(8.75,1.45) 38(8.75,2.72) 39(8.75,3.99) 40(8.75,5.26)
  rect 0.9x1.5 smd: 15(-6.985,-12.5) 16(-5.715,-12.5) 17(-4.445,-12.5) 18(-3.175,-12.5) 19(-1.905,-12.5) 20(-0.635,-12.5) 21(0.635,-12.5) 22(1.905,-12.5) 23(3.175,-12.5) 24(4.445,-12.5) 25(5.715,-12.5) 26(6.985,-12.5)
  rect 0.9x0.9 smd: 41_1(-1.5,-2.46) 41_2(-2.9,-2.46) 41_3(-0.1,-2.46) 41_4(-2.9,-3.86) 41_5(-1.5,-3.86) 41_6(-0.1,-3.86) 41_7(-2.9,-1.06) 41_8(-1.5,-1.06)
  rect 0.9x0.9 smd mask+0.102: 41_9(-0.1,-1.06)
  round 0.4 hole 0.2 mask+0: 41_10(-1.5,-1.76) 41_11(-2.9,-1.76) 41_12(-0.1,-1.76) 41_13(-2.9,-3.16) 41_14(-1.5,-3.16) 41_15(-0.1,-3.16) 41_16(-2.2,-1.06) 41_17(-0.8,-1.06) 41_18(-2.2,-2.46) 41_19(-0.8,-2.46) 41_20(-2.2,-3.86) 41_21(-0.8,-3.86)
  Keep-Out Layer region: 9,6.75 -9,6.75 -9,12.75 9,12.75
  Keep-Out Layer region: 9,6.75 -9,6.75 -9,12.75 9,12.75
  silkscreen extent -10.3,-12.75 9,12.75
XCVR_M138_MODEM [mm]
  rect 0.6x2 smd: 1(0.7,-4.1) 2(1.1,4.1) 3(1.5,-4.1) 4(1.9,4.1) 5(2.3,-4.1) 6(2.7,4.1) 7(3.1,-4.1) 8(3.5,4.1) 9(3.9,-4.1) 10(4.3,4.1) 11(4.7,-4.1) 12(5.1,4.1) 13(5.5,-4.1) 14(5.9,4.1) 15(6.3,-4.1) 16(6.7,4.1) 17(10.3,-4.1) 18(10.7,4.1) 19(11.1,-4.1) 20(11.5,4.1) 21(11.9,-4.1) 22(12.3,4.1) 23(12.7,-4.1) 24(13.1,4.1) 25(13.5,-4.1) 26(13.9,4.1) 27(14.3,-4.1) 28(14.7,4.1) 29(15.1,-4.1) 30(15.5,4.1) 31(15.9,-4.1) 32(16.3,4.1) 33(16.7,-4.1) 34(17.1,4.1) 35(17.5,-4.1) 36(17.9,4.1) 37(18.3,-4.1) 38(18.7,4.1) 39(19.1,-4.1) 40(19.5,4.1) 41(19.9,-4.1) 42(20.3,4.1) 43(20.7,-4.1) 44(21.1,4.1) 45(21.5,-4.1) 46(21.9,4.1) 47(22.3,-4.1) 48(22.7,4.1) 49(23.1,-4.1) 50(23.5,4.1) 51(23.9,-4.1) 52(24.3,4.1)
  rect 2.3x3.2 smd: 53(-2.15,-3.5) 54(27.15,-3.5)
  rect 1.5x1.9 smd: S1_1(0.4,53.05) S2_1(24.6,53.05)
  rect 1.2x2.7 smd: S1_2(-0.85,47.15) S1_3(1.65,47.15) S2_2(23.35,47.15) S2_3(25.85,47.15)
  round 1.63 hole 1.63 unplated: ""(0,0)
  round 1.58 hole 1.58 unplated: ""(0.4,50.3)
  round 1.08 hole 1.08 unplated: ""(24.6,50.3)
  round 1.13 hole 1.13 unplated: ""(25,0)
  silkscreen extent -2.54,-6.23 27.61,54.37

## Part data
C1 C3 C4 C5 C6 C7 C8 C9 C10 C11 C12 C13 C14 C15 C16 C17 C18 C19 C20 C21 C22 C23 C24 C25 C26 C27 C28 C29 C30 C32 C33 C35 C36 C37 C47 C49 C51 C52 C53 C54: library part C0402, "Ceramic Chip Capacitor - Standard", PackageDocument=Mar-2001, Code_IPC="1005 [0402]", Code_JEITA=0402, ComponentLink1Description="Manufacturer Link", ComponentLink1URL=http://www.kemet.com/, ComponentLink2Description=Datasheet, ComponentLink2URL=http://www.kemet.com/kemet/web/homepage/kechome.nsf/vapubfilesname/F3102TA.pdf/$file/F3102TA.pdf, DatasheetDocument=Mar-2001, LatestRevisionDate=19-Mar-2004, LatestRevisionNote="Silkscreen size reduced.", Note="Footprint corresponds to dimensions for bulk cassette packaging. This case size has tightened tolerances.", PackageReference=0402, Published=17-Jul-2002, Publisher="Altium Limited"
C2 C31: library part Tant0805
C34 C38 C39 C43 C44 C45 C46 C48: "Ceramic Chip Capacitor - Standard", PackageDocument=Mar-2001, ComponentLink1Description="Manufacturer Link", ComponentLink1URL=http://www.kemet.com/, ComponentLink2Description=Datasheet, ComponentLink2URL=http://www.kemet.com/kemet/web/homepage/kechome.nsf/vapubfilesname/F3102TA.pdf/$file/F3102TA.pdf, DatasheetDocument=Mar-2001, LatestRevisionDate=19-Mar-2004, LatestRevisionNote="Silkscreen size reduced.", Published=17-Jul-2002, Publisher="Altium Limited"
  C34 C48: Code_IPC="1608 [0603]", Code_JEITA=0603, Note="Footprint corresponds to dimensions for bulk cassette packaging. This case size has tightened tolerances.", PackageReference=0603
  C38: 50V=1nF, Code_IPC="1608 [0603]", Code_JEITA=0603, Note="Footprint corresponds to dimensions for bulk cassette packaging. This case size has tightened tolerances.", PackageReference=0603
  C39 C44: 50V=10uF, Code_IPC="3216 [1206]", Code_JEITA=1206, PackageReference=1206
  C43: Code_IPC=2012[0805], Code_JEITA=0805, Note="Footprint corresponds to dimensions for bulk cassette packaging. This case size has tightened tolerances.", PackageReference=0805
  C45: Code_IPC="1005 [0402]", Code_JEITA=0402, Note="Footprint corresponds to dimensions for bulk cassette packaging. This case size has tightened tolerances.", PackageReference=0402
  C46: 6.3V=10uF, Code_IPC=2012[0805], Code_JEITA=0805, Note="Footprint corresponds to dimensions for bulk cassette packaging. This case size has tightened tolerances.", PackageReference=0805
C40 C41: "Solid Tantalum Chip Capacitor, Standard T495 Series - 35V 10%", PackageDocument=Mar-2001, Code_JEITA=7343-43, ComponentLink1Description="Manufacturer Link", ComponentLink1URL=http://www.kemet.com/, ComponentLink2Description=Datasheet, ComponentLink2URL=http://www.kemet.com/kemet/web/homepage/kechome.nsf/vapubfilesname/F3102TA.pdf/$file/F3102TA.pdf, DatasheetDocument=Mar-2001, LatestRevisionDate=19-Mar-2004, LatestRevisionNote="Silkscreen dimensions re-sized.", PackageReference=X, PCB_Layout="Round Glue Pad at 2.9 ±0.1mm in diameter at KEMET's option", Published=17-Jul-2002, Publisher="Altium Limited"
C42: "100V 20%", PackageDocument=Mar-2001, 100V, 20%=100nF, Code_IPC="1608 [0603]", Code_JEITA=0603, ComponentLink1Description="Manufacturer Link", ComponentLink1URL=http://www.kemet.com/, ComponentLink2Description=Datasheet, ComponentLink2URL=http://www.kemet.com/kemet/web/homepage/kechome.nsf/vapubfilesname/F3102TA.pdf/$file/F3102TA.pdf, DatasheetDocument=Mar-2001, LatestRevisionDate=19-Mar-2004, LatestRevisionNote="Silkscreen size reduced.", Note="Footprint corresponds to dimensions for bulk cassette packaging. This case size has tightened tolerances.", PackageReference=0603, Published=17-Jul-2002, Publisher="Altium Limited"
C50: library part T495X, "Solid Tantalum Chip Capacitor, Standard T495 Series - Low ESR, Surge Robust", PackageDocument=Mar-2001, Code_JEITA=7343-43, ComponentLink1Description="Manufacturer Link", ComponentLink1URL=http://www.kemet.com/, ComponentLink2Description=Datasheet, ComponentLink2URL=http://www.kemet.com/kemet/web/homepage/kechome.nsf/vapubfilesname/F3102TA.pdf/$file/F3102TA.pdf, DatasheetDocument=Mar-2001, LatestRevisionDate=19-Mar-2004, LatestRevisionNote="Silkscreen dimensions re-sized.", PackageReference=X, PCB_Layout="Round Glue Pad at 2.9 ±0.1mm in diameter at KEMET's option", Published=17-Jul-2002, Publisher="Altium Limited"
D1 D3: library part Diode_PMEG3050EP
D2: library part SMBJ24CA
D4: "Diode Schottky 100V 250mA (DC) Surface Mount SOD-323F", Package="SOD-323 NXP Semiconductors", Availability=Bad, MF="NXP Semiconductors", MP=BAT46WJ, Price=None, SnapEDA_Link=https://www.snapeda.com/parts/BAT46WJ/NXP%20Semiconductors/view-part/4222338/?ref=snap
FL1 FL2: "1ÂµF Feed Through Capacitor 100V 6A 5mOhm 1206 (3216 Metric), 4 PC Pad", Package="1206 TDK", Availability=Good, Check_prices=https://www.snapeda.com/parts/YFF31HC2A105MT000N/TDK-Lambda%20Americas%20Inc/view-part/566443/?ref=eda, MF=TDK, MP=YFF31HC2A105MT000N, Price=None, Purchase-URL=https://pricing.snapeda.com/search/part/YFF31HC2A105MT000N/?ref=eda, SnapEDA_Link=https://www.snapeda.com/parts/YFF31HC2A105MT000N/TDK-Lambda%20Americas%20Inc/view-part/566443/?ref=snap
J1 J2: "Connector Header Surface Mount 4 position 0.039 _1.00mm_", Package=None, Availability=Unavailable, MF="JST Sales", MP=BM04B-SRSS-TB_LF__SN_, Price=None, SnapEDA_Link=https://www.snapeda.com/parts/BM04B-SRSS-TB%28LF%29%28SN%29/JST%20Sales%20America%20Inc./view-part/91778/?ref=snap
L2: Supplier Part Number 1=1276-6902-1-ND, Supplier 1=Digi-Key
L3: library part Inductor_0630CDMCD
MP1: "RF Shield"
P1: library part pushbutton, Supplier Part Number 1=450-1757-2-ND, Supplier 1=Digi-Key
P2: library part microSD_Molex_hinged, Supplier Part Number 1=WM19081DKR-ND, Supplier 1=Digi-Key
P3 P16: "Header, 14-Pin", LatestRevisionDate=17-Jul-2002, LatestRevisionNote="Re-released for DXP Platform.", Publisher="Altium Limited"
P4 P10: library part "Header 2", "Header, 2-Pin", LatestRevisionDate=17-Jul-2002, LatestRevisionNote="Re-released for DXP Platform.", Publisher="Altium Limited"
P5 P7 P15 P18 P19 P21: library part "Header 3", "Header, 3-Pin", LatestRevisionDate=17-Jul-2002, LatestRevisionNote="Re-released for DXP Platform.", Publisher="Altium Limited"
P6 P24 P25 P33: library part HDR_2x1_2mm
P8: library part "Header 7", "Header, 7-Pin", LatestRevisionDate=17-Jul-2002, LatestRevisionNote="Re-released for DXP Platform.", Publisher="Altium Limited"
P9: library part "Header 9", "Header, 9-Pin", LatestRevisionDate=17-Jul-2002, LatestRevisionNote="Re-released for DXP Platform.", Publisher="Altium Limited"
P11: "Header, 12-Pin", LatestRevisionDate=17-Jul-2002, LatestRevisionNote="Re-released for DXP Platform.", Publisher="Altium Limited"
P12: library part Header8_SMT, "Surface mount header", Supplier Part Number 1=649-1012938090801BLF, Supplier 1=Mouser
P13: "Header, 5-Pin, Dual row", LatestRevisionDate=17-Jul-2002, LatestRevisionNote="Re-released for DXP Platform.", Publisher="Altium Limited"
P14: library part "Header 4", "Header, 4-Pin", LatestRevisionDate=17-Jul-2002, LatestRevisionNote="Re-released for DXP Platform.", Publisher="Altium Limited"
P17: "Header, 5-Pin", LatestRevisionDate=17-Jul-2002, LatestRevisionNote="Re-released for DXP Platform.", Publisher="Altium Limited"
R1 R2 R3 R4 R5 R15 R16 R22 R23: library part ERJ3RK, "Precision Thick Film Chip Resistor, 10 Ohm to 1M Ohm Range, 1% and 0.5% Tolerance, 0603 Size, 0.063 W", PackageDocument=Mar-2003, Code_IPC="1608 [0603]", ComponentLink1Description="Manufacturer Link", ComponentLink1URL=http://www.panasonic.com/industrial/components/resistive_products.htm, ComponentLink2Description=Datasheet, ComponentLink2URL=http://www.panasonic.com/industrial/components/pdf/AOA0000CE2.pdf, LatestRevisionDate=19-Mar-2004, LatestRevisionNote="Silkscreen size reduced.", PackageReference=3-0603, Published=17-Dec-2003, Publisher="Altium Limited"
R6 R7 R8 R9 R10 R12 R13 R14 R17 R18 R19 R24: library part ERJ3EK, "Precision Thick Film Chip Resistor, 10 Ohm to 1M Ohm Range, 1% and 0.5% Tolerance, 0603 Size, 0.063 W", PackageDocument=Mar-2003, Code_IPC="1608 [0603]", ComponentLink1Description="Manufacturer Link", ComponentLink1URL=http://www.panasonic.com/industrial/components/resistive_products.htm, ComponentLink2Description=Datasheet, ComponentLink2URL=http://www.panasonic.com/industrial/components/pdf/AOA0000CE2.pdf, LatestRevisionDate=19-Mar-2004, LatestRevisionNote="Silkscreen size reduced.", PackageReference=3-0603, Published=17-Dec-2003, Publisher="Altium Limited"
R11: library part ERJ8EN, "Precision Thick Film Chip Resistor, 10 Ohm to 2.2M Ohm Range, 1% Tolerance, 1206 Size, 0.125 W", PackageDocument=Mar-2003, Code_IPC="3216 [1206]", ComponentLink1Description="Manufacturer Link", ComponentLink1URL=http://www.panasonic.com/industrial/components/resistive_products.htm, ComponentLink2Description=Datasheet, ComponentLink2URL=http://www.panasonic.com/industrial/components/pdf/AOA0000CE2.pdf, LatestRevisionDate=19-Mar-2004, LatestRevisionNote="Silkscreen size reduced.", PackageReference=8-1206, Published=17-Dec-2003, Publisher="Altium Limited"
R20 R21: library part ERJ2RB, "Precision Thick Film Chip Resistor, 10 Ohm to 1M Ohm Range, 1% and 0.5% Tolerance, 0402 Size, 0.063 W", PackageDocument=Mar-2003, Code_IPC="1005 [0402]", ComponentLink1Description="Manufacturer Link", ComponentLink1URL=http://www.panasonic.com/industrial/components/resistive_products.htm, ComponentLink2Description=Datasheet, ComponentLink2URL=http://www.panasonic.com/industrial/components/pdf/AOA0000CE2.pdf, LatestRevisionDate=19-Mar-2004, LatestRevisionNote="Silkscreen size reduced.", PackageReference=2-0402, Published=17-Dec-2003, Publisher="Altium Limited"
U1: library part ESP32-S3-WROOM-1-N16R2, "Bluetooth, WiFi 802.11b/g/n, Bluetooth v5.0 Transceiver Module 2.4GHz PCB Trace Surface Mount", Package=None, Availability="In Stock", Check_prices=https://www.snapeda.com/parts/ESP32-S3-WROOM-1-N16R2/Espressif+Systems/view-part/?ref=eda, MF="Espressif Systems", MP=ESP32-S3-WROOM-1-N16R2, Price=None, Purchase-URL=https://pricing.snapeda.com/search/part/ESP32-S3-WROOM-1-N16R2/?ref=eda, SnapEDA_Link=https://www.snapeda.com/parts/ESP32-S3-WROOM-1-N16R2/Espressif+Systems/view-part/?ref=snap
U2 U4 U5 U9 U10: library part LP3985IM5-3.3, "Micropower, 150mA Low-Noise Ultra Low-Dropout CMOS Voltage Regulator", DigiKeyPartNumber=LP3985IM5-3.3CT-ND, Manufacturer="National Semiconductor", PackageTopMarking=LDQB*XTT, PowerWise=N, ComponentLink1Description="LP3985 Datasheet", ComponentLink1URL=http://www.national.com/ds/LP/LP3985.pdf, ComponentLink2Description="LP3985 Web Page", ComponentLink2URL=http://www.national.com/pf/LP/LP3985.html, ComponentLink3Description="MF05A Package Page", ComponentLink3URL=http://www.national.com/packaging/folders/mf05a.html, CompType="LDO IC", DatasheetVersion=Aug-2005, PackageDescription="Molded SOT-23, .115 x .063 x .040 in Body, 5 Lead, .0375 in Pitch", PackageReference=MF05A, PackageVersion="revD, Aug-2008", PartNumber=LP3985IM5-3.3, PinCount=5, Published=4-Dec-2008, Publisher="Altium Limited", RoHS=O
U3: "Audio CODEC"
U6: library part AP7361C-33Y5-13
U11: library part "GPS SAM-M8Q"
U13: "Battery Charger Li-Ion 2000mA 4.2V Automotive 12-Pin MSOP EP Tube", Package="MSOP W/ EP-12 Analog Devices", Digi-Key_Part_Number=LT3652IMSE#PBF-ND, Digi-Key_Purchase_URL=https://www.digikey.com/product-detail/en/linear-technology-analog-devices/LT3652IMSE-PBF/LT3652IMSE-PBF-ND/2237473?utm_source=snapeda&utm_medium=aggregator&utm_campaign=symbol, MF="Analog Devices", MP=LT3652IMSE#PBF, SnapEDA_Link=https://www.snapeda.com/parts/LT3652IMSE%23PBF/Analog%20Devices/view-part/4331669/?ref=snap
U14: "Swarm M138 Modem", Package=Package, Availability="Not in stock", Check_prices=https://www.snapeda.com/parts/M138%20Modem/Swarm/view-part/?ref=eda, MF=Swarm, MP="M138 Modem", Price=None, SnapEDA_Link=https://www.snapeda.com/parts/M138%20Modem/Swarm/view-part/?ref=snap
U15: "Linear Voltage Regulator IC 1 Output 2A 6-DFN _3x3_", Package="DFN-6 STMicroelectronics", Availability=Unavailable, MF=STMicroelectronics, MP=LD39200PU33R, Price=None, SnapEDA_Link=https://www.snapeda.com/parts/LD39200PU33R/STMicroelectronics/view-part/482679/?ref=snap

## Free pads (board coordinates)
  round 157.48 hole 120: 0(7085,-1533.62) 0(7085,-10)
  round 221 hole 221: 1(3627.44,-5697.64)
  round 39.37 smd: 10(0,-5195) 10(0,0) 10(7290,-5195) 10(7290,0)

## Via types
v1: diameter 50, hole 28, Top Layer to Bottom Layer, 64 vias
v2: diameter 28, hole 15, Top Layer to Bottom Layer, tented both sides, 61 vias
v3: diameter 20, hole 10, Top Layer to Bottom Layer, tented both sides, 59 vias
v4: diameter 50, hole 28, Top Layer to Bottom Layer, tented both sides, 16 vias
v5: diameter 40, hole 16, Top Layer to Bottom Layer, tented both sides, 5 vias
v6: diameter 19.68, hole 7.87, Top Layer to Bottom Layer, 4 vias
v7: diameter 38, hole 16, Top Layer to Bottom Layer, tented both sides, 2 vias

## Nets (pads, with @x,y where several pads share a name; then routed paths per layer and width w, separated by ;. In a path a pad name is that pad's centre, name@x,y a point inside that pad or via, vN(x,y) a via of type N, cw(c..) or ccw(c..) an arc to the next point about the centre after c; other vN are vias at no path point)
3V3: C1.1 C21.2 J1.2 J2.2 P3.2 P13.1 P14.1 R5.2 R6.1 R8.1 R15.2 R17.1 R18.1 R19.1 R21.1 R24.1 U1.2 U6.5 U11.3 | length 3444
  Top Layer w6: J1.2@1722.13,-5498.94 1722.13,-5367.87 v1(1785,-5305) ; v7(2190,-599.88) 2201.91,-599.88 2216.79,-585 R6.1@2256.54,-585 R8.1@2256.54,-645 ; J2.2@2231.89,-5498.94 2231.89,-5441.89 2375,-5298.78 v1(2375,-5260)
  Top Layer w8: P3.2@-30,-3300 72.66,-3197.34 cw(c78.31,-3203) 78.31,-3195 206.69,-3195 ccw(c206.69,-3176.16) 219.7,-3189.78 ccw(c212,-3187.62) 220,-3187.66 220,-3169.97 cw(c228,-3169.97) 222.34,-3164.31 226.65,-3160 C1.1@230.59,-3160 230.59,-3147.68 cw(c238.59,-3147.72) 232.9,-3142.1 257.69,-3117.31 ccw(c252,-3111.69) 260,-3111.69 U1.2@260,-3078.98 ; R21.1@60.59,-3480 60.59,-3540.59 v1(115,-3595) v1(115,-3595) 205.94,-3595.08 205.94,-3515.35 C21.2@205.59,-3515 ; R19.1@1128.46,-4140 1465,-4140 1505,-4100 v1(1660,-4100) 1758.46,-4100 R18.1@1765,-4093.46 1771.54,-4100 R17.1@1876.54,-4100 ; R24.1@2108.46,-4920 2175,-4920 v1(2180,-4915) ; P14.1@3213.31,-6231.1 3486.02,-6231.1 ccw(c3486.02,-6223.1) 3491.66,-6228.77 3780,-5940.43 R15.2@3780,-5938.46 R5.2@3845,-5938.46 ; U11.3@5363.31,-5695.91 5369.21,-5690 v4(5825,-5690)
4V2: C38.2 FL2.3 P6.1 P13.9 P15.2 P21.1 P33.1 R3.2 | length 5709.2
  Top Layer w8: P13.9@1980,-1130 2955,-1130 3310,-775 3310,-384.69 3305.31,-380 3157.83,-380 FL2.3@3155,-377.17 ; C38.2@3997.44,-31.1 4144.99,-31.1 cw(c4144.99,-39.1) 4150.65,-33.45 4183.31,-66.1 4258.98,-66.1 P21.1@4262.44,-62.64 ; 4190,-1287.44 4190,-1415 4215,-1440 4445,-1440 4451.69,-1433.31 R3.2@4451.69,-1388.9
  Top Layer w20: FL2.3@3155,-377.17 3155,-343.22 cw(c3175,-343.28) 3160.8,-329.2 3251.63,-238.37 cw(c3265.77,-252.52) 3251.68,-238.32 P33.1@3481.54,-8.46
  Top Layer w50: P33.1@3487.44,-4.21 3487.44,-131.2 ccw(c3537.44,-131.1) 3537.34,-181.1 3757.44,-181.1 ; P6.1@3757.44,-4.37 3757.44,-181.1 ; P15.2@4122.44,-1287.64 4122.64,-1287.44 4190,-1287.44 4226.97,-1287.44 4247.8,-1266.61 ccw(c4212.44,-1231.26) 4262.44,-1231.26 4262.44,-191.1 ; P21.1@4262.44,-62.64 4262.44,-191.1 ; 3757.44,-181.1 4252.44,-181.1 4262.44,-191.1
AGND: C4.1 C5.2 C6.2 C7.2 C8.1 C9.2 C10.2 C11.1 C12.2 C13.1 C14.2 C15.2 C16.2 C18.2 C20.2 C23.1 C24.1 C36.2 C37.1 C51.1 C52.1 P4.1 P5.3 P7.3 P17.1 P18.3 P19.3 U2.2 U3.1 U3.2 U3.8 U3.15 U3.20 U3.21 U3.27 U3.32 U3.33 U4.2 U5.2 | length 3596.4
  Top Layer w6: v1@2365,-2950 v1(2364.41,-2950.59) C18.2@2520,-2950.59 ; C20.2@2435,-3060.59 2435,-3130 2449.08,-3144.08 P5.3@2449.08,-3243.94 ; C10.2@2495.54,-4395.04 2495.54,-4322.56 U4.2@2495.97,-4322.13 ; v1(2595.59,-2885.59) C8.1@2650,-2885.59 ; v1(2775,-3545) C36.2@2854.41,-3545 2854.41,-3586.49 2857.92,-3590 C52.1@2914.41,-3590 ; U3.15@2974.87,-3493.31 3012.27,-3493.31 v6(3029.98,-3475.59) 3043.76,-3461.81 U3.20@3043.76,-3530.71 ; v1(2975,-3150) 3015,-3190 C4.1@3015,-3239.41 ; U3.8@2996.52,-3377.17 2996.52,-3388.5 2999.52,-3391.5 2999.52,-3401.82 U3.33@3051.64,-3453.94 ; U3.21@3059.51,-3530.71 U3.33@3059.51,-3461.81 ; v6(3073.29,-3475.59) U3.33@3059.51,-3461.81 ; U3.33@3075.26,-3477.56 U3.27@3128.41,-3477.56 ; U3.1@3106.76,-3377.17 U3.2@3091.01,-3377.17 U3.33@3091.01,-3414.57 ; C51.1@3125.59,-3590 3125.59,-3660.81 cw(c3119.59,-3660.81) 3123.85,-3665.04 3113.36,-3675.52 ccw(c3117.64,-3679.74) 3111.64,-3679.7 v4(3111.64,-3718.94) 3144.01,-3718.94 ccw(c3144.01,-3712.94) 3148.23,-3717.2 3242.24,-3623.19 ccw(c3237.98,-3618.96) 3243.26,-3621.81 3247.24,-3614.44 ccw(c3241.96,-3611.6) 3247.89,-3612.51 C37.1@3250.59,-3595 C24.1@3250.59,-3540 C23.1@3250.59,-3490 ; U3.32@3128.41,-3398.82 3106.76,-3398.82 U3.33@3091.01,-3414.57 ; U3.33@3051.64,-3453.94 v6(3073.29,-3432.28) U3.33@3091.01,-3414.57 ; U3.33@3051.64,-3453.94 U3.33@3059.51,-3461.81
  Top Layer w8: C9.2@2456.83,-4097.76 2491.28,-4097.76 2495.97,-4102.44 ; v4(2494.95,-4035.04) 2495.97,-4036.06 2495.97,-4102.44 ; C12.2@2536.83,-4102.76 2496.28,-4102.76 2495.97,-4102.44 ; C16.2@2775.77,-3248.76 2816.36,-3248.76 2816.64,-3248.48 ; v4(2815.77,-3308.17) 2816.64,-3307.3 2816.64,-3248.48 ; U5.2@2816.64,-3029.39 2816.64,-2922.3 2850.77,-2888.17 2881.36,-2888.17 C15.2@2885.77,-2892.58 ; v1(2829.23,-2845.77) 2891.09,-2845.77 2895.77,-2850.46 C15.2@2895.77,-2892.58 ; C14.2@2855.77,-3253.76 2855.18,-3253.17 2821.32,-3253.17 2816.64,-3248.48 ; v1(2966.3,-4176.3) C6.2@3073.27,-4176.3 C6.2@3067.32,-4182.24 ; C5.2@3073.36,-3810.21 3110.87,-3810.21 3110.87,-3809.96 cw(c3118.87,-3809.96) 3110.87,-3809.89 ; 3110.87,-3809.89 v4(3111.64,-3718.94) ; 3110.89,-3810.2 cw(c3112.95,-3817.93) 3112.91,-3809.93 C7.2@3148.08,-3809.93 ; C11.1@3320.59,-3390 3428.97,-3390 3455.04,-3363.94 P18.3@3461.64,-3363.94 3461.64,-3418.36 3430,-3450 C13.1@3385.59,-3450
  Top Layer w12: U4.2@2495.97,-4322.13 2495.97,-4102.44 ; 2816.64,-3248.48 U5.2@2816.64,-3029.39 ; 3110.87,-3810.21 3110.87,-4023.83 U2.2@3112.4,-4039.49
  other v6: 3029.98,-3432.28
BAT: C46.2 D4.A FL2.1 R11.2 R13.1 U13.9 | length 1591
  Top Layer w8: R13.1@2257.44,-771.1 2257.44,-827.44 2265,-835 2345,-835 2370,-810 2394.96,-810 R11.2@2417.32,-787.64 2415.04,-785.35 C46.2@2415.04,-697.64 2420.31,-692.36 2420.31,-651 2526,-651 2549,-674 2549,-680 v5(2555,-680) ; 2557.36,-722.36 2587.66,-752.66 2597.68,-762.68 ccw(c2603.31,-757) 2603.31,-765 D4.A@2620,-765 ; 2557.34,-722.34 cw(c2563.02,-716.71) 2555.02,-716.74 v5(2555,-680) ; 2567.03,-653.61 2567.03,-658.67 cw(c2559.03,-658.67) 2564.69,-664.33 2555,-674.01 v5(2555,-680) ; 2567.03,-653.57 cw(c2575.03,-653.65) 2567.77,-650.29 2571.22,-642.84 cw(c2593,-652.91) 2572.83,-639.91 2574.38,-637.5 cw(c2594.56,-650.5) 2594.52,-626.5 2628.5,-626.5 ccw(c2628.5,-617.5) 2632.24,-625.69 2632.3,-625.66 2638.12,-622.99 ccw(c2634.8,-615.71) 2642.8,-615.71 2642.8,-565.8 ccw(c2634.8,-565.8) 2640.46,-560.14 2638.11,-557.8 U13.9@2601,-557.8 ; FL2.1@3152.83,-525 FL2.1@3155,-522.83
  Top Layer w20: v1(3070,-645) 3070,-535 3080,-525 FL2.1@3152.83,-525
  Bottom Layer w30: v5(2555,-680) v1(3070,-645)
BCLK: C8.2 P11.3 U1.17 U3.9 | length 2733.4
  Top Layer w6: 1891.06,-2833.94 2650,-2833.94 2693.12,-2833.94 2696.64,-2837.45 2696.64,-3256.84 2838.62,-3398.82 U3.9@2974.87,-3398.82
  Top Layer w8: U1.17@909.21,-2909.49 1206.17,-2909.49 cw(c1206.17,-2917.49) 1211.79,-2911.79 1397.69,-3097.69 ccw(c1403.31,-3092) 1403.27,-3100 P11.3@1425,-3100 1621.69,-3100 ccw(c1621.69,-3092) 1627.33,-3097.67 1891.06,-2833.94
BOOST: C45.1 D4.C U13.11 | length 500.5
  Top Layer w8: U13.11@2601,-506.6 2658.4,-506.6 2670.9,-519.1 ; D4.C@2635,-675 2653.37,-675 ccw(c2653.37,-667) 2659.02,-672.66 2666.96,-664.72 ccw(c2666.96,-656.72) 2672.61,-662.39 ; 2672.62,-662.38 2685,-650 2685,-533.2 2670.9,-519.1 ; 2771.45,-421.82 ccw(c2771.49,-429.82) 2765.85,-424.15 2670.9,-519.1 ; 2771.49,-421.82 C45.1@2860,-421.82
BUTTON: P1.1 P11.1 U1.15 | length 3618.6
  Top Layer w8: U1.15@909.21,-3009.49 1134.49,-3009.49 P11.1@1425,-3300 ; P1.1@3008.27,-1717.17 3008.27,-2468.27 v1(3040,-2500)
  Bottom Layer w8: P11.1@1425,-3300 1980,-3300 2180,-3100 2180,-2690 2370,-2500 v1(3040,-2500)
CHIP_PU: C35.1 P3.3 P12.6 R21.2 U1.3 | length 2286.6
  Top Layer w8: R21.2@9.41,-3480 C35.1@9.41,-3430 9.41,-3390.59 60.23,-3339.77 60.23,-3309.77 P3.3@70,-3300 293.02,-3166.64 ccw(c288.9,-3159.79) 294.56,-3165.44 307.69,-3152.31 ccw(c302,-3146.69) 310,-3146.69 U1.3@310,-3078.98 ; v1(695,-1995) 695,-1855 P12.6@700,-1850
  Bottom Layer w8: P3.3@70,-3300 215,-3155 215,-2908.27 cw(c223,-2908.31) 217.31,-2902.69 557.4,-2562.6 557.4,-2487.6 715,-2330 715,-2026.37 695,-2006.37 v1(695,-1995)
CHRG: P13.5 R6.2 U13.4 | length 1064.1
  Top Layer w6: v5(2196.64,-540.25) 2203.39,-547 2230.64,-547 2233.64,-550 2319.95,-550 2323.46,-553.51 R6.2@2323.46,-585
  Top Layer w8: R6.2@2335.91,-577.64 2359.05,-577.64 ccw(c2359.05,-569.64) 2364.69,-575.31 2370.77,-569.23 cw(c2376.39,-574.92) 2371.83,-568.35 cw(c2406.42,-618.64) 2411.1,-557.78 ccw(c2411.65,-549.8) 2411.6,-557.8 U13.4@2429,-557.8
  Bottom Layer w6: P13.5@1780,-1130 1780,-890 2129.75,-540.25 v5(2196.64,-540.25)
CHRGA: P11.11 U1.25 | length 602.6
  Top Layer w8: U1.25@909.21,-2509.49 1145.51,-2509.49 1355,-2300 P11.11@1425,-2300
CS: P2.2 P3.5 R17.2 U1.5 | length 3234.1
  Top Layer w8: P3.5@270,-3300 410,-3160 U1.5@410,-3078.98 ; P2.2@1825.51,-4420.28 1825.79,-4420 v1(2080,-4420) 2080,-4341.82 2010,-4271.82 2010,-4120 1990,-4100 R17.2@1943.46,-4100
  Bottom Layer w8: P3.5@270,-3300 270,-3336.69 ccw(c278,-3336.69) 272.33,-3342.33 1347.69,-4417.69 ccw(c1353.31,-4412) 1353.27,-4420 v1(2080,-4420)
D+: P3.14 U1.14 | length 401.6
  Top Layer w8: U1.14@860,-3078.98 948.98,-3078.98 P3.14@1170,-3300
D-: P3.13 U1.13 | length 390.2
  Top Layer w8: U1.13@810,-3078.98 810,-3145 845,-3180 950,-3180 P3.13@1070,-3300